# Altium PCB powMan_powPath.PcbDoc
Units mm, origin at the board's own origin, x right, y up, seen from the top; angles counter-clockwise.
Board outline 19.3 x 25.78 mm, 2 copper layers (Top Layer, Bottom Layer); 21 components, 13 nets, 59 pads, 39 vias.
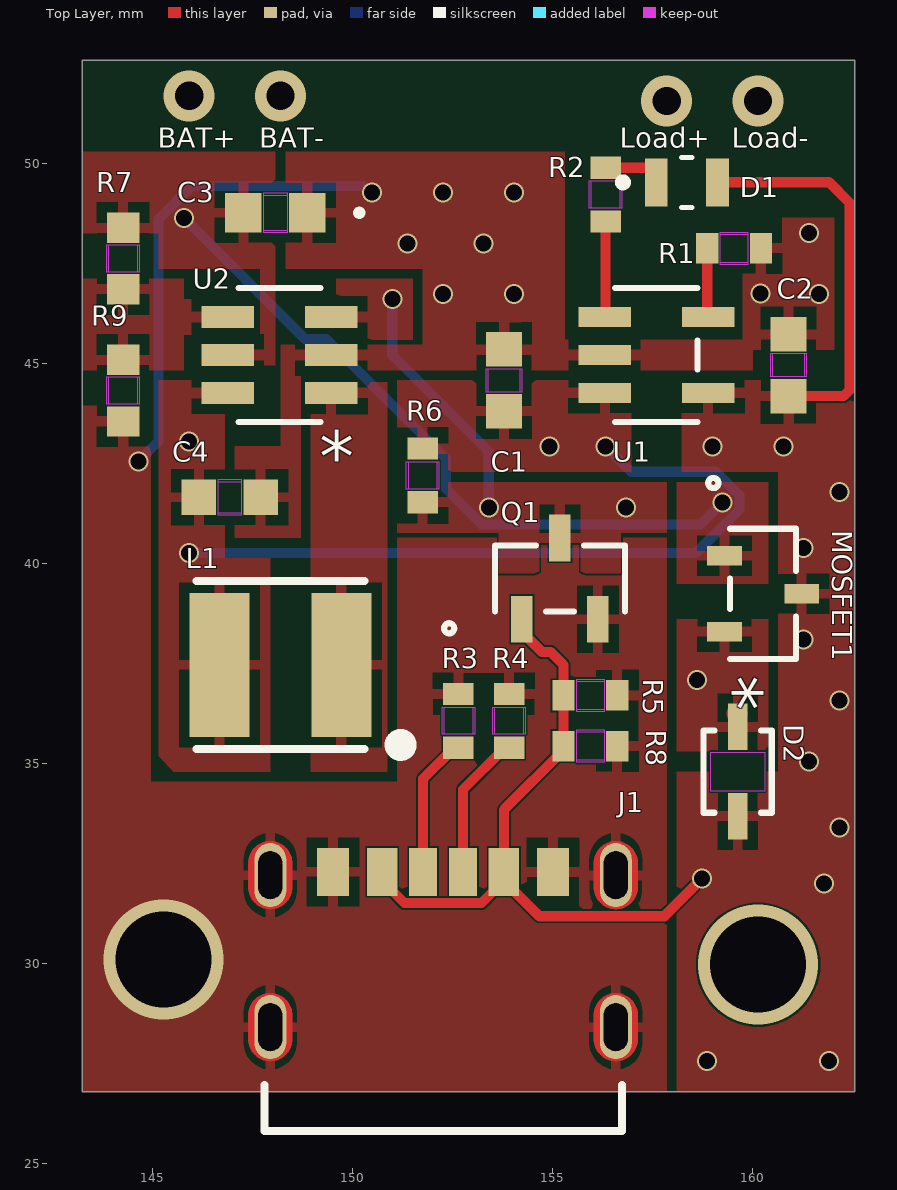
[diagram p0: Top Layer view]
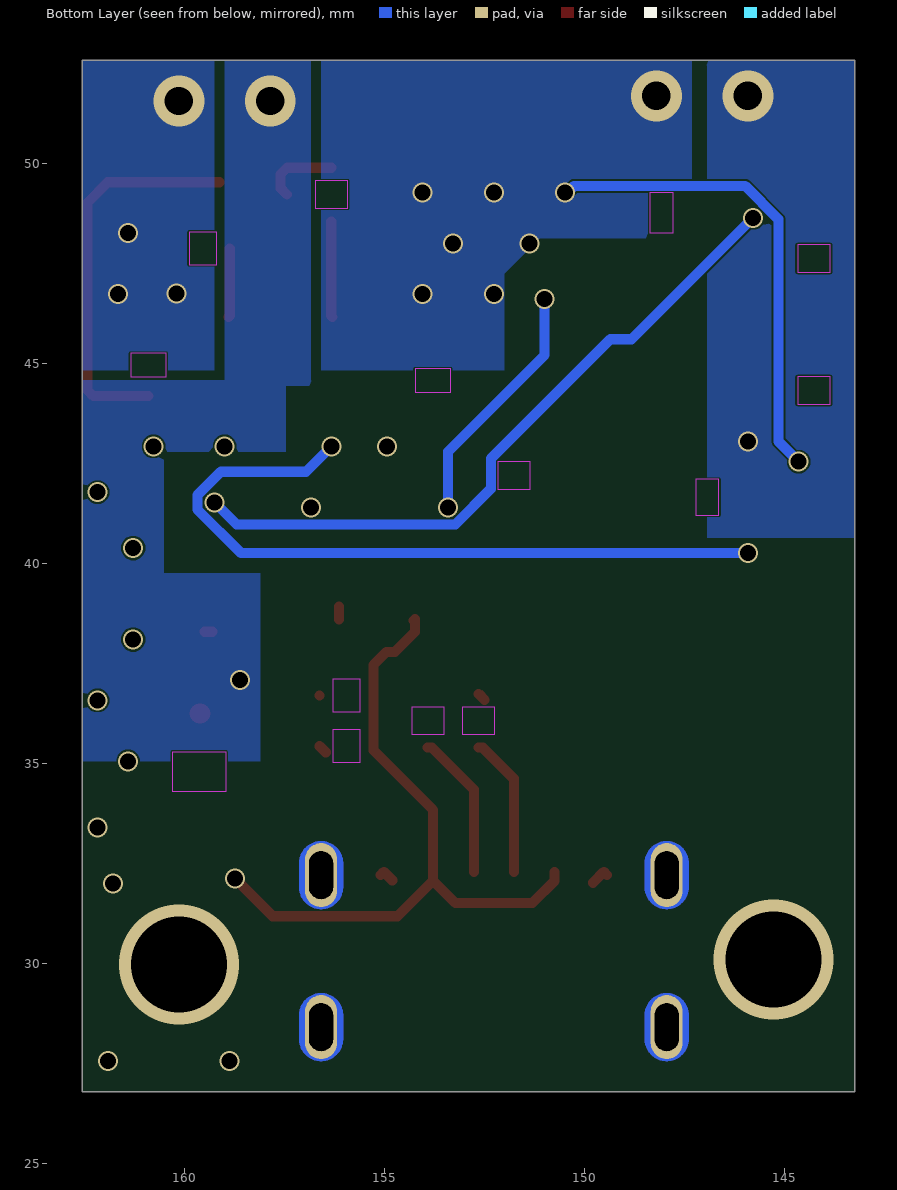
[diagram p1: Bottom Layer view, seen from below]
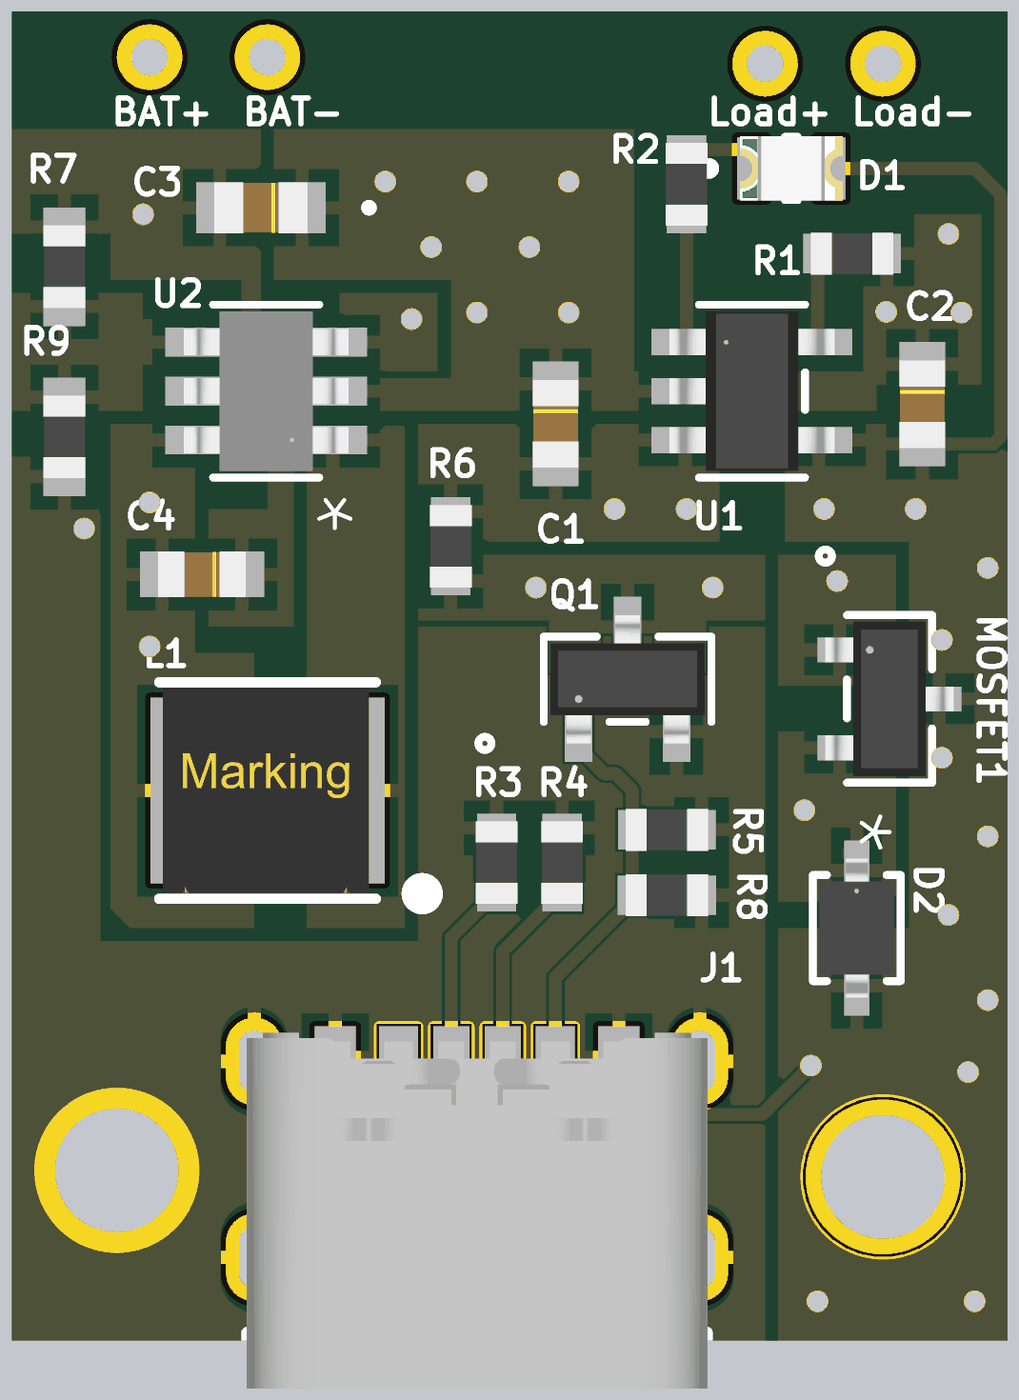
[diagram p2: 3D render of the assembled board from above, using the file's embedded part models]

## Layer stack, top to bottom
Top Solder: solder mask 0.0102, Solder Resist, Dk 3.5
Top Layer: signal copper 0.0356
Dielectric 1: dielectric 0.32, FR-4, Dk 4.8
Bottom Layer: signal copper 0.0356
Bottom Solder: solder mask 0.0102, Solder Resist, Dk 3.5

## Board outline
143.256,26.797 162.56,26.797 162.56,52.578 143.256,52.578

## Design rules (kind name [scope] priority, off if disabled: settings)
Clearance [All] p1: gap=0.05 ignorepadtopadclearanceinfootprint=TRUE
PlaneConnect Pad_Connect [(InPadClass('All Pads'))] p1: planeconnectstyle=Direct reliefexpansion=0.508 reliefentries=4 reliefconductorwidth=0.254 reliefairgap=0.254
PolygonConnect Direct_Connect_Vias [IsVia] p1: thpad.connectstyle=Direct thpad.reliefconductorwidth=0.254 thpad.reliefentries=4 thpad.polygonreliefangle="90 Angle" thpad.airgapwidth=0.254 smdpad.connectstyle=Relief smdpad.reliefconductorwidth=0.254 smdpad.reliefentries=4 smdpad.polygonreliefangle="90 Angle" smdpad.airgapwidth=0.254 via.connectstyle=Direct via.reliefconductorwidth=0.254 via.reliefentries=4 via.polygonreliefangle="90 Angle" via.airgapwidth=0.254
PolygonConnect [All] p2: connectstyle=Relief reliefconductorwidth=0.254 reliefentries=4 polygonreliefangle="90 Angle" airgapwidth=0.254
RoutingVias [All] p1: holewidth=0.711 width=1.27 viastyle="Through Hole" minholewidth=0.711 minwidth=1.27 maxholewidth=0.711 maxwidth=1.27
SolderMaskExpansion [All] p1: expansion=0.102 istentingtop=FALSE
Width [All] p1: maxlimit=0.5 minlimit=0.254 preferedwidth=0.254
29 further rules are at their usual default settings.

## Components (designator, comment, footprint, x,y, rotation, side; value= is the part's Value field where it differs from the comment)
C1 "4.7uF" CAP_0603_CL10A_1P6XP8_SAM 153.797,44.577 r270 top
C2 "4.7uF" CAP_0603_CL10A_1P6XP8_SAM 160.909,44.958 r270 top
C3 "10uF" CAP_0603_X1_WAL 148.082,48.768 r180 top
C4 "4.7 uF" CAP_0603_CL10A_1P6XP8_SAM 146.939,41.656 r180 top
D1 "LED" LED_KT-0805W 158.369,49.53 r0 top
D2 "BAT60JFILM" CR_60JFILM_STM 159.639,34.798 r270 top
J1 "USB4125-GF-A_REVA2" GCT_USB4125-GF-A_REVA2 152.273,29.21 r0 top
L1 "WE-LQS_4018" WE-LQS_4018 148.21,37.465 r0 top
MOSFET1 "NX2301P,215" SOT23_TO-236AB_NEX-L 160.274,39.243 r270 top
Q1 "2N7002NXAKR" TO-236AB_SOT23_NEX 155.194,39.624 r0 top
R1 "2K" RC0603N_YAG-L 159.549,47.879 r0 top
R2 "470" RC0603N_YAG-L 156.337,49.223 r90 top
R3 "5.1K" RC0603N_YAG-L 152.654,36.068 r90 top
R4 "5.1K" RC0603N_YAG-L 153.924,36.068 r90 top
R5 "100K" RC0603N_YAG-L 155.956,36.703 r0 top
R6 "100K" "RC0603N_YAG-L - duplicate" 151.765,42.202 r90 top
R7 "976K" RC0603N_YAG 144.272,47.625 r270 top
R8 "100K" "RC0603N_YAG-L - duplicate" 155.956,35.433 r180 top
R9 "309K" RC0603N_YAG 144.272,44.323 r270 top
U1 "MCP73831T-2ATI/OT" SOT-23-5_MC_MCH 157.607,45.212 r0 top
U2 "MCP1640BT-I/CHY" SOT-23-6_MC_MCH 148.184,45.212 r180 top

## Footprints (in the part's own frame and the unit in brackets; to place one, negate y for a bottom-side part, rotate by r counter-clockwise, add the part's x,y. Pads: shape width x height; smd on the part's side, far side on the other; paste and mask are expansions set on the pad)
CAP_0603_CL10A_1P6XP8_SAM [mil]
  rect 34x35 smd paste+0 mask+0: 1(-30.5,0) 2(30.5,0)
  Top Layer keep-out region: -11.5,-15.5 -11.5,15.5 11.5,15.5 11.5,-15.5
  Keep-Out Layer region: -11.5,-17.5 -11.5,17.5 11.5,17.5 11.5,-17.5
  body extent -34,-17 34,17, height 35
CAP_0603_X1_WAL [mil]
  rect 36x39 smd paste+0 mask+0: 1(-31.5,0) 2(31.5,0)
  Top Layer keep-out region: -11.5,-17.5 -11.5,17.5 11.5,17.5 11.5,-17.5
  Keep-Out Layer region: -11.5,-19.5 -11.5,19.5 11.5,19.5 11.5,-19.5
  silkscreen extent -86,-3 -80,3, body extent -36,-19 36,19, height 39
CR_60JFILM_STM [mil]
  rect 45.56x19.36 smd paste+0 mask+0: 1(-44,0) 2(44,0)
  Keep-Out Layer region: -19.22,-26.5 -19.22,26.5 19.22,26.5 19.22,-26.5
  silkscreen extent -41,-34 41,34, body extent -53,-29 53,29, height 45
GCT_USB4125-GF-A_REVA2 [mm]
  rect 0.7x1.2 smd: A5(-0.5,3.08) B5(0.5,3.08)
  rect 0.76x1.2 smd: A9(1.52,3.08) B9(-1.52,3.08)
  rect 0.8x1.2 smd: A12(2.75,3.08) B12(-2.75,3.08)
  oval 0.8x1.6 hole 0.6 slot 1.2 at 90 deg mask+0: S1(-4.32,3) S2(4.32,3) S3(-4.32,-0.8) S4(4.32,-0.8)
  Top Layer region: 4.349,3.849 4.377,3.847 4.406,3.843 4.434,3.838 4.462,3.831 4.49,3.823 4.517,3.813 4.544,3.802 4.57,3.79 4.595,3.776 4.62,3.761 4.643,3.745 4.666,3.727 4.688,3.709 4.709,3.689 4.729,3.668 4.747,3.646 4.765,3.623 4.781,3.6 4.796,3.575 4.81,3.55 4.822,3.524 4.833,3.497 4.843,3.47 4.851,3.442 4.858,3.414 4.863,3.386 4.867,3.357 4.869,3.329 4.87,3.3 4.87,2.7 4.869,2.671 4.867,2.643 4.863,2.614 4.858,2.586 4.851,2.558 4.843,2.53 4.833,2.503 4.822,2.476 4.81,2.45 4.796,2.425 4.781,2.4 4.765,2.377 4.747,2.354 4.729,2.332 4.709,2.311 4.688,2.291 4.666,2.273 4.643,2.255 4.62,2.239 4.595,2.224 4.57,2.21 4.544,2.198 4.517,2.187 4.49,2.177 4.462,2.169 4.434,2.162 4.406,2.157 4.377,2.153 4.349,2.151 4.32,2.15 4.291,2.151 4.263,2.153 4.234,2.157 4.206,2.162 4.178,2.169 4.15,2.177 4.123,2.187 4.096,2.198 4.07,2.21 4.045,2.224 4.02,2.239 3.997,2.255 3.974,2.273 3.952,2.291 3.931,2.311 3.911,2.332 3.893,2.354 3.875,2.377 3.859,2.4 3.844,2.425 3.83,2.45 3.818,2.476 3.807,2.503 3.797,2.53 3.789,2.558 3.782,2.586 3.777,2.614 3.773,2.643 3.771,2.671 3.77,2.7 3.77,3.3 3.771,3.329 3.773,3.357 3.777,3.386 3.782,3.414 3.789,3.442 3.797,3.47 3.807,3.497 3.818,3.524 3.83,3.55 3.844,3.575 3.859,3.6 3.875,3.623 3.893,3.646 3.911,3.668 3.931,3.689 3.952,3.709 3.974,3.727 3.997,3.745 4.02,3.761 4.045,3.776 4.07,3.79 4.096,3.802 4.123,3.813 4.15,3.823 4.178,3.831 4.206,3.838 4.234,3.843 4.263,3.847 4.291,3.849 4.32,3.85
  Top Layer region: -4.291,3.849 -4.263,3.847 -4.234,3.843 -4.206,3.838 -4.178,3.831 -4.15,3.823 -4.123,3.813 -4.096,3.802 -4.07,3.79 -4.045,3.776 -4.02,3.761 -3.997,3.745 -3.974,3.727 -3.952,3.709 -3.931,3.689 -3.911,3.668 -3.893,3.646 -3.875,3.623 -3.859,3.6 -3.844,3.575 -3.83,3.55 -3.818,3.524 -3.807,3.497 -3.797,3.47 -3.789,3.442 -3.782,3.414 -3.777,3.386 -3.773,3.357 -3.771,3.329 -3.77,3.3 -3.77,2.7 -3.771,2.671 -3.773,2.643 -3.777,2.614 -3.782,2.586 -3.789,2.558 -3.797,2.53 -3.807,2.503 -3.818,2.476 -3.83,2.45 -3.844,2.425 -3.859,2.4 -3.875,2.377 -3.893,2.354 -3.911,2.332 -3.931,2.311 -3.952,2.291 -3.974,2.273 -3.997,2.255 -4.02,2.239 -4.045,2.224 -4.07,2.21 -4.096,2.198 -4.123,2.187 -4.15,2.177 -4.178,2.169 -4.206,2.162 -4.234,2.157 -4.263,2.153 -4.291,2.151 -4.32,2.15 -4.349,2.151 -4.377,2.153 -4.406,2.157 -4.434,2.162 -4.462,2.169 -4.49,2.177 -4.517,2.187 -4.544,2.198 -4.57,2.21 -4.595,2.224 -4.62,2.239 -4.643,2.255 -4.666,2.273 -4.688,2.291 -4.709,2.311 -4.729,2.332 -4.747,2.354 -4.765,2.377 -4.781,2.4 -4.796,2.425 -4.81,2.45 -4.822,2.476 -4.833,2.503 -4.843,2.53 -4.851,2.558 -4.858,2.586 -4.863,2.614 -4.867,2.643 -4.869,2.671 -4.87,2.7 -4.87,3.3 -4.869,3.329 -4.867,3.357 -4.863,3.386 -4.858,3.414 -4.851,3.442 -4.843,3.47 -4.833,3.497 -4.822,3.524 -4.81,3.55 -4.796,3.575 -4.781,3.6 -4.765,3.623 -4.747,3.646 -4.729,3.668 -4.709,3.689 -4.688,3.709 -4.666,3.727 -4.643,3.745 -4.62,3.761 -4.595,3.776 -4.57,3.79 -4.544,3.802 -4.517,3.813 -4.49,3.823 -4.462,3.831 -4.434,3.838 -4.406,3.843 -4.377,3.847 -4.349,3.849 -4.32,3.85
  Top Layer region: 4.349,0.049 4.377,0.047 4.406,0.043 4.434,0.038 4.462,0.031 4.49,0.023 4.517,0.013 4.544,0.002 4.57,-0.01 4.595,-0.024 4.62,-0.039 4.643,-0.055 4.666,-0.073 4.688,-0.091 4.709,-0.111 4.729,-0.132 4.747,-0.154 4.765,-0.177 4.781,-0.2 4.796,-0.225 4.81,-0.25 4.822,-0.276 4.833,-0.303 4.843,-0.33 4.851,-0.358 4.858,-0.386 4.863,-0.414 4.867,-0.443 4.869,-0.471 4.87,-0.5 4.87,-1.1 4.869,-1.129 4.867,-1.157 4.863,-1.186 4.858,-1.214 4.851,-1.242 4.843,-1.27 4.833,-1.297 4.822,-1.324 4.81,-1.35 4.796,-1.375 4.781,-1.4 4.765,-1.423 4.747,-1.446 4.729,-1.468 4.709,-1.489 4.688,-1.509 4.666,-1.527 4.643,-1.545 4.62,-1.561 4.595,-1.576 4.57,-1.59 4.544,-1.602 4.517,-1.613 4.49,-1.623 4.462,-1.631 4.434,-1.638 4.406,-1.643 4.377,-1.647 4.349,-1.649 4.32,-1.65 4.291,-1.649 4.263,-1.647 4.234,-1.643 4.206,-1.638 4.178,-1.631 4.15,-1.623 4.123,-1.613 4.096,-1.602 4.07,-1.59 4.045,-1.576 4.02,-1.561 3.997,-1.545 3.974,-1.527 3.952,-1.509 3.931,-1.489 3.911,-1.468 3.893,-1.446 3.875,-1.423 3.859,-1.4 3.844,-1.375 3.83,-1.35 3.818,-1.324 3.807,-1.297 3.797,-1.27 3.789,-1.242 3.782,-1.214 3.777,-1.186 3.773,-1.157 3.771,-1.129 3.77,-1.1 3.77,-0.5 3.771,-0.471 3.773,-0.443 3.777,-0.414 3.782,-0.386 3.789,-0.358 3.797,-0.33 3.807,-0.303 3.818,-0.276 3.83,-0.25 3.844,-0.225 3.859,-0.2 3.875,-0.177 3.893,-0.154 3.911,-0.132 3.931,-0.111 3.952,-0.091 3.974,-0.073 3.997,-0.055 4.02,-0.039 4.045,-0.024 4.07,-0.01 4.096,0.002 4.123,0.013 4.15,0.023 4.178,0.031 4.206,0.038 4.234,0.043 4.263,0.047 4.291,0.049 4.32,0.05
  Top Layer region: -4.291,0.049 -4.263,0.047 -4.234,0.043 -4.206,0.038 -4.178,0.031 -4.15,0.023 -4.123,0.013 -4.096,0.002 -4.07,-0.01 -4.045,-0.024 -4.02,-0.039 -3.997,-0.055 -3.974,-0.073 -3.952,-0.091 -3.931,-0.111 -3.911,-0.132 -3.893,-0.154 -3.875,-0.177 -3.859,-0.2 -3.844,-0.225 -3.83,-0.25 -3.818,-0.276 -3.807,-0.303 -3.797,-0.33 -3.789,-0.358 -3.782,-0.386 -3.777,-0.414 -3.773,-0.443 -3.771,-0.471 -3.77,-0.5 -3.77,-1.1 -3.771,-1.129 -3.773,-1.157 -3.777,-1.186 -3.782,-1.214 -3.789,-1.242 -3.797,-1.27 -3.807,-1.297 -3.818,-1.324 -3.83,-1.35 -3.844,-1.375 -3.859,-1.4 -3.875,-1.423 -3.893,-1.446 -3.911,-1.468 -3.931,-1.489 -3.952,-1.509 -3.974,-1.527 -3.997,-1.545 -4.02,-1.561 -4.045,-1.576 -4.07,-1.59 -4.096,-1.602 -4.123,-1.613 -4.15,-1.623 -4.178,-1.631 -4.206,-1.638 -4.234,-1.643 -4.263,-1.647 -4.291,-1.649 -4.32,-1.65 -4.349,-1.649 -4.377,-1.647 -4.406,-1.643 -4.434,-1.638 -4.462,-1.631 -4.49,-1.623 -4.517,-1.613 -4.544,-1.602 -4.57,-1.59 -4.595,-1.576 -4.62,-1.561 -4.643,-1.545 -4.666,-1.527 -4.688,-1.509 -4.709,-1.489 -4.729,-1.468 -4.747,-1.446 -4.765,-1.423 -4.781,-1.4 -4.796,-1.375 -4.81,-1.35 -4.822,-1.324 -4.833,-1.297 -4.843,-1.27 -4.851,-1.242 -4.858,-1.214 -4.863,-1.186 -4.867,-1.157 -4.869,-1.129 -4.87,-1.1 -4.87,-0.5 -4.869,-0.471 -4.867,-0.443 -4.863,-0.414 -4.858,-0.386 -4.851,-0.358 -4.843,-0.33 -4.833,-0.303 -4.822,-0.276 -4.81,-0.25 -4.796,-0.225 -4.781,-0.2 -4.765,-0.177 -4.747,-0.154 -4.729,-0.132 -4.709,-0.111 -4.688,-0.091 -4.666,-0.073 -4.643,-0.055 -4.62,-0.039 -4.595,-0.024 -4.57,-0.01 -4.544,0.002 -4.517,0.013 -4.49,0.023 -4.462,0.031 -4.434,0.038 -4.406,0.043 -4.377,0.047 -4.349,0.049 -4.32,0.05
  Bottom Layer region: 4.349,3.849 4.377,3.847 4.406,3.843 4.434,3.838 4.462,3.831 4.49,3.823 4.517,3.813 4.544,3.802 4.57,3.79 4.595,3.776 4.62,3.761 4.643,3.745 4.666,3.727 4.688,3.709 4.709,3.689 4.729,3.668 4.747,3.646 4.765,3.623 4.781,3.6 4.796,3.575 4.81,3.55 4.822,3.524 4.833,3.497 4.843,3.47 4.851,3.442 4.858,3.414 4.863,3.386 4.867,3.357 4.869,3.329 4.87,3.3 4.87,2.7 4.869,2.671 4.867,2.643 4.863,2.614 4.858,2.586 4.851,2.558 4.843,2.53 4.833,2.503 4.822,2.476 4.81,2.45 4.796,2.425 4.781,2.4 4.765,2.377 4.747,2.354 4.729,2.332 4.709,2.311 4.688,2.291 4.666,2.273 4.643,2.255 4.62,2.239 4.595,2.224 4.57,2.21 4.544,2.198 4.517,2.187 4.49,2.177 4.462,2.169 4.434,2.162 4.406,2.157 4.377,2.153 4.349,2.151 4.32,2.15 4.291,2.151 4.263,2.153 4.234,2.157 4.206,2.162 4.178,2.169 4.15,2.177 4.123,2.187 4.096,2.198 4.07,2.21 4.045,2.224 4.02,2.239 3.997,2.255 3.974,2.273 3.952,2.291 3.931,2.311 3.911,2.332 3.893,2.354 3.875,2.377 3.859,2.4 3.844,2.425 3.83,2.45 3.818,2.476 3.807,2.503 3.797,2.53 3.789,2.558 3.782,2.586 3.777,2.614 3.773,2.643 3.771,2.671 3.77,2.7 3.77,3.3 3.771,3.329 3.773,3.357 3.777,3.386 3.782,3.414 3.789,3.442 3.797,3.47 3.807,3.497 3.818,3.524 3.83,3.55 3.844,3.575 3.859,3.6 3.875,3.623 3.893,3.646 3.911,3.668 3.931,3.689 3.952,3.709 3.974,3.727 3.997,3.745 4.02,3.761 4.045,3.776 4.07,3.79 4.096,3.802 4.123,3.813 4.15,3.823 4.178,3.831 4.206,3.838 4.234,3.843 4.263,3.847 4.291,3.849 4.32,3.85
  Bottom Layer region: -4.291,3.849 -4.263,3.847 -4.234,3.843 -4.206,3.838 -4.178,3.831 -4.15,3.823 -4.123,3.813 -4.096,3.802 -4.07,3.79 -4.045,3.776 -4.02,3.761 -3.997,3.745 -3.974,3.727 -3.952,3.709 -3.931,3.689 -3.911,3.668 -3.893,3.646 -3.875,3.623 -3.859,3.6 -3.844,3.575 -3.83,3.55 -3.818,3.524 -3.807,3.497 -3.797,3.47 -3.789,3.442 -3.782,3.414 -3.777,3.386 -3.773,3.357 -3.771,3.329 -3.77,3.3 -3.77,2.7 -3.771,2.671 -3.773,2.643 -3.777,2.614 -3.782,2.586 -3.789,2.558 -3.797,2.53 -3.807,2.503 -3.818,2.476 -3.83,2.45 -3.844,2.425 -3.859,2.4 -3.875,2.377 -3.893,2.354 -3.911,2.332 -3.931,2.311 -3.952,2.291 -3.974,2.273 -3.997,2.255 -4.02,2.239 -4.045,2.224 -4.07,2.21 -4.096,2.198 -4.123,2.187 -4.15,2.177 -4.178,2.169 -4.206,2.162 -4.234,2.157 -4.263,2.153 -4.291,2.151 -4.32,2.15 -4.349,2.151 -4.377,2.153 -4.406,2.157 -4.434,2.162 -4.462,2.169 -4.49,2.177 -4.517,2.187 -4.544,2.198 -4.57,2.21 -4.595,2.224 -4.62,2.239 -4.643,2.255 -4.666,2.273 -4.688,2.291 -4.709,2.311 -4.729,2.332 -4.747,2.354 -4.765,2.377 -4.781,2.4 -4.796,2.425 -4.81,2.45 -4.822,2.476 -4.833,2.503 -4.843,2.53 -4.851,2.558 -4.858,2.586 -4.863,2.614 -4.867,2.643 -4.869,2.671 -4.87,2.7 -4.87,3.3 -4.869,3.329 -4.867,3.357 -4.863,3.386 -4.858,3.414 -4.851,3.442 -4.843,3.47 -4.833,3.497 -4.822,3.524 -4.81,3.55 -4.796,3.575 -4.781,3.6 -4.765,3.623 -4.747,3.646 -4.729,3.668 -4.709,3.689 -4.688,3.709 -4.666,3.727 -4.643,3.745 -4.62,3.761 -4.595,3.776 -4.57,3.79 -4.544,3.802 -4.517,3.813 -4.49,3.823 -4.462,3.831 -4.434,3.838 -4.406,3.843 -4.377,3.847 -4.349,3.849 -4.32,3.85
  Bottom Layer region: 4.349,0.049 4.377,0.047 4.406,0.043 4.434,0.038 4.462,0.031 4.49,0.023 4.517,0.013 4.544,0.002 4.57,-0.01 4.595,-0.024 4.62,-0.039 4.643,-0.055 4.666,-0.073 4.688,-0.091 4.709,-0.111 4.729,-0.132 4.747,-0.154 4.765,-0.177 4.781,-0.2 4.796,-0.225 4.81,-0.25 4.822,-0.276 4.833,-0.303 4.843,-0.33 4.851,-0.358 4.858,-0.386 4.863,-0.414 4.867,-0.443 4.869,-0.471 4.87,-0.5 4.87,-1.1 4.869,-1.129 4.867,-1.157 4.863,-1.186 4.858,-1.214 4.851,-1.242 4.843,-1.27 4.833,-1.297 4.822,-1.324 4.81,-1.35 4.796,-1.375 4.781,-1.4 4.765,-1.423 4.747,-1.446 4.729,-1.468 4.709,-1.489 4.688,-1.509 4.666,-1.527 4.643,-1.545 4.62,-1.561 4.595,-1.576 4.57,-1.59 4.544,-1.602 4.517,-1.613 4.49,-1.623 4.462,-1.631 4.434,-1.638 4.406,-1.643 4.377,-1.647 4.349,-1.649 4.32,-1.65 4.291,-1.649 4.263,-1.647 4.234,-1.643 4.206,-1.638 4.178,-1.631 4.15,-1.623 4.123,-1.613 4.096,-1.602 4.07,-1.59 4.045,-1.576 4.02,-1.561 3.997,-1.545 3.974,-1.527 3.952,-1.509 3.931,-1.489 3.911,-1.468 3.893,-1.446 3.875,-1.423 3.859,-1.4 3.844,-1.375 3.83,-1.35 3.818,-1.324 3.807,-1.297 3.797,-1.27 3.789,-1.242 3.782,-1.214 3.777,-1.186 3.773,-1.157 3.771,-1.129 3.77,-1.1 3.77,-0.5 3.771,-0.471 3.773,-0.443 3.777,-0.414 3.782,-0.386 3.789,-0.358 3.797,-0.33 3.807,-0.303 3.818,-0.276 3.83,-0.25 3.844,-0.225 3.859,-0.2 3.875,-0.177 3.893,-0.154 3.911,-0.132 3.931,-0.111 3.952,-0.091 3.974,-0.073 3.997,-0.055 4.02,-0.039 4.045,-0.024 4.07,-0.01 4.096,0.002 4.123,0.013 4.15,0.023 4.178,0.031 4.206,0.038 4.234,0.043 4.263,0.047 4.291,0.049 4.32,0.05
  Bottom Layer region: -4.291,0.049 -4.263,0.047 -4.234,0.043 -4.206,0.038 -4.178,0.031 -4.15,0.023 -4.123,0.013 -4.096,0.002 -4.07,-0.01 -4.045,-0.024 -4.02,-0.039 -3.997,-0.055 -3.974,-0.073 -3.952,-0.091 -3.931,-0.111 -3.911,-0.132 -3.893,-0.154 -3.875,-0.177 -3.859,-0.2 -3.844,-0.225 -3.83,-0.25 -3.818,-0.276 -3.807,-0.303 -3.797,-0.33 -3.789,-0.358 -3.782,-0.386 -3.777,-0.414 -3.773,-0.443 -3.771,-0.471 -3.77,-0.5 -3.77,-1.1 -3.771,-1.129 -3.773,-1.157 -3.777,-1.186 -3.782,-1.214 -3.789,-1.242 -3.797,-1.27 -3.807,-1.297 -3.818,-1.324 -3.83,-1.35 -3.844,-1.375 -3.859,-1.4 -3.875,-1.423 -3.893,-1.446 -3.911,-1.468 -3.931,-1.489 -3.952,-1.509 -3.974,-1.527 -3.997,-1.545 -4.02,-1.561 -4.045,-1.576 -4.07,-1.59 -4.096,-1.602 -4.123,-1.613 -4.15,-1.623 -4.178,-1.631 -4.206,-1.638 -4.234,-1.643 -4.263,-1.647 -4.291,-1.649 -4.32,-1.65 -4.349,-1.649 -4.377,-1.647 -4.406,-1.643 -4.434,-1.638 -4.462,-1.631 -4.49,-1.623 -4.517,-1.613 -4.544,-1.602 -4.57,-1.59 -4.595,-1.576 -4.62,-1.561 -4.643,-1.545 -4.666,-1.527 -4.688,-1.509 -4.709,-1.489 -4.729,-1.468 -4.747,-1.446 -4.765,-1.423 -4.781,-1.4 -4.796,-1.375 -4.81,-1.35 -4.822,-1.324 -4.833,-1.297 -4.843,-1.27 -4.851,-1.242 -4.858,-1.214 -4.863,-1.186 -4.867,-1.157 -4.869,-1.129 -4.87,-1.1 -4.87,-0.5 -4.869,-0.471 -4.867,-0.443 -4.863,-0.414 -4.858,-0.386 -4.851,-0.358 -4.843,-0.33 -4.833,-0.303 -4.822,-0.276 -4.81,-0.25 -4.796,-0.225 -4.781,-0.2 -4.765,-0.177 -4.747,-0.154 -4.729,-0.132 -4.709,-0.111 -4.688,-0.091 -4.666,-0.073 -4.643,-0.055 -4.62,-0.039 -4.595,-0.024 -4.57,-0.01 -4.544,0.002 -4.517,0.013 -4.49,0.023 -4.462,0.031 -4.434,0.038 -4.406,0.043 -4.377,0.047 -4.349,0.049 -4.32,0.05
  silkscreen extent -4.47,-3.4 4.47,-2.25, body extent -4.47,-3.34 4.47,3.56, height 3.27
LED_KT-0805W [mm]
  rect 0.57x1.2 smd: A(0.765,0) C(-0.765,0)
  silkscreen extent -1.7,-0.63 0.13,0.63, body extent -1,-0.63 1,0.63, height 0.8
RC0603N_YAG [mil]
  rect 29.78x32 smd paste+0 mask+0: 1(-30.39,0) 2(30.39,0)
  Top Layer keep-out region: -13.5,-14 -13.5,14 13.5,14 13.5,-14
  Keep-Out Layer region: -13.5,-16 -13.5,16 13.5,16 13.5,-16
  body extent -31,-16 31,16, height 28
RC0603N_YAG-L [mm]
  rect 0.556x0.763 smd paste+0 mask+0: 1(-0.672,0) 2(0.672,0)
  Top Layer keep-out region: -0.343,-0.356 -0.343,0.356 0.343,0.356 0.343,-0.356
  Keep-Out Layer region: -0.343,-0.406 -0.343,0.406 0.343,0.406 0.343,-0.406
  body extent -0.8,-0.41 0.8,0.41, height 0.71
"RC0603N_YAG-L - duplicate" [mil]
  rect 22x30 smd paste+0 mask+0: 1(-26.5,0) 2(26.5,0)
  Top Layer keep-out region: -13.5,-14 -13.5,14 13.5,14 13.5,-14
  Keep-Out Layer region: -13.5,-16 -13.5,16 13.5,16 13.5,-16
  body extent -31,-16 31,16, height 28
SOT23_TO-236AB_NEX-L [mil]
  rect 19x34 smd paste+0 mask+0: 1(-37.4,-38) 2(37.4,-38) 3(0,38)
  silkscreen extent -114,-54 64,33, body extent -59,-49 59,49, height 43
SOT-23-5_MC_MCH [mil]
  rect 51.56x20 smd paste+0 mask+0: 1(-51,37.4) 2(-51,0) 3(-51,-37.4) 4(51,-37.4) 5(51,37.4)
  silkscreen extent -40,-66 40,66, body extent -63,-61 63,61, height 57
SOT-23-6_MC_MCH [mil]
  rect 52x22 smd paste+0 mask+0: 1(-51,37.4) 2(-51,0) 3(-51,-37.4) 4(51,-37.4) 5(51,0) 6(51,37.4)
  silkscreen extent -41,-66 41,66, body extent -63,-61 63,61, height 57
TO-236AB_SOT23_NEX [mil]
  rect 21x46 smd paste+0 mask+0: 1(-37.4,-40) 2(37.4,-40) 3(0,40)
  silkscreen extent -114,-54 64,32, body extent -59,-49 59,49, height 43
WE-LQS_4018 [mm]
  rect 1.5x3.6 smd: 1(1.525,0) 2(-1.525,0)
  silkscreen extent -2.1,-2.2 3.2,2.1, body extent -2.03,-2 1.97,2, height 1.81

## Part data
C1 C2 C4: library part CL10A475KP8NNNC, "4.7 uF Capacitor 0603", Manufacturer_Name=Samsung, Copyright="Copyright (C) 2025 Ultra Librarian. All rights reserved.", Manufacturer_Part_Number=CL10A475KP8NNNC
C3: library part 0603X106M100CT, "capacitor 10 uF 0603", Manufacturer_Name=Walsin, Copyright="Copyright (C) 2026 Ultra Librarian. All rights reserved.", Manufacturer_Part_Number=0603X106M100CT
D1: library part KT-0805W, "Light Emitting Diodes", Package=Package, Check_prices=https://www.snapeda.com/parts/KT-0805W/Hubei+KENTO+Elec/view-part/?ref=eda, MF="Hubei KENTO Elec", MP=KT-0805W, SnapEDA_Link=https://www.snapeda.com/parts/KT-0805W/Hubei+KENTO+Elec/view-part/?ref=snap
D2: "10 V General pupose  Signal Schottky Diode", Manufacturer_Name=STMicroelectronics, Copyright="Copyright (C) 2025 Ultra Librarian. All rights reserved.", Manufacturer_Part_Number=BAT60JFILM
J1: "USB C female connector", Package=None, Availability=Unavailable, MP=USB4125-GF-A_REVA2, Price=None
L1: "INDICATEUR FIXE 4,7 UH 1,7 A 70 MOHM CMS", Package="Nonstandard WÃ¼rth Elektronik", Check_prices=https://www.snapeda.com/parts/74404042047/W%25C3%25BCrth+Elektronik+Midcom/view-part/?ref=eda, MF="WÃ¼rth Elektronik", MP=74404042047, SnapEDA_Link=https://www.snapeda.com/parts/74404042047/W%25C3%25BCrth+Elektronik+Midcom/view-part/?ref=snap
MOSFET1: "MOSFET P-Chanel 400mW", Manufacturer_Name=Nexperia, Copyright="Copyright (C) 2025 Ultra Librarian. All rights reserved.", Manufacturer_Part_Number=NX2301P,215
Q1: "N-MOSFET 60VDS 190ID", Manufacturer_Name=Nexperia, Copyright="Copyright (C) 2025 Ultra Librarian. All rights reserved.", Manufacturer_Part_Number=2N7002NXAKR
R1: library part RC0603FR-072KL, "RES SMD 2kO 1% 1/10W 0603", Manufacturer_Name=Yageo, Copyright="Copyright (C) 2025 Ultra Librarian. All rights reserved.", Manufacturer_Part_Number=RC0603FR-072KL
R2: library part RC0603FR-07470RL, "RESISTOR; 0603; 470 OHM; 1%; 100PPM; 0.1W; THICK FILM", Manufacturer_Name=Yageo, Copyright="Copyright (C) 2026 Ultra Librarian. All rights reserved.", Manufacturer_Part_Number=RC0603FR-07470RL
R3 R4: library part RC0603FR-075K1L, "RES 5.1K SMD 0603", Manufacturer_Name=Yageo, Copyright="Copyright (C) 2025 Ultra Librarian. All rights reserved.", Manufacturer_Part_Number=RC0603FR-075K1L
R5 R6 R8: library part RC0603FR-07100KL, "RES, 100 k, 1%, 0.1 W, 0603", Manufacturer_Name=Yageo, Copyright="Copyright (C) 2025 Ultra Librarian. All rights reserved.", Manufacturer_Part_Number=RC0603FR-07100KL
R7: library part RC0603FR-07976KL, "resistor 976K 0603", Manufacturer_Name=Yageo, Copyright="Copyright (C) 2026 Ultra Librarian. All rights reserved.", Manufacturer_Part_Number=RC0603FR-07976KL
R9: library part RC0603FR-07309KL, "resistor 309K 0603", Manufacturer_Name=Yageo, Copyright="Copyright (C) 2025 Ultra Librarian. All rights reserved.", Manufacturer_Part_Number=RC0603FR-07309KL
U1: library part MCP73831T-2ATIOT, "Miniature Single-Cell, Fully Integrated Li-Ion, / Li-Polymer Charge Management Controller", Manufacturer_Name=Microchip, Copyright="Copyright (C) 2026 Ultra Librarian. All rights reserved.", Manufacturer_Part_Number=MCP73831T-2ATI/OT, RefDes=RefDes, Type=Type
U2: library part MCP1640BT-ICHY, "Boost Regulator max input 5.5V output 2 - 5.5V max output 350mA", Manufacturer_Name=Microchip, Copyright="Copyright (C) 2025 Ultra Librarian. All rights reserved.", Manufacturer_Part_Number=MCP1640BT-I/CHY, RefDes=RefDes, Type=Type

## Via types
v1: diameter 0.5, hole 0.4, Top Layer to Bottom Layer, tented both sides, 33 vias
v2: diameter 1.27, hole 0.711, Top Layer to Bottom Layer, 4 vias
v3: diameter 3, hole 2.4, Top Layer to Bottom Layer, 2 vias

## Nets (pads, with @x,y where several pads share a name; then routed paths per layer and width w, separated by ;. In a path a pad name is that pad's centre, name@x,y a point inside that pad or via, vN(x,y) a via of type N, cw(c..) or ccw(c..) an arc to the next point about the centre after c; other vN are vias at no path point)
Battery+: C1.2 C4.2 L1.2 R6.2 U1.3 U2.6 | length 18.4
  Bottom Layer w0.254: v1(145.923,40.259) 158.592,40.259 159.685,41.352 159.685,41.706 159.098,42.292 156.971,42.292 v1(156.337,42.926)
  other v1: 154.94,42.926 145.923,43.053
  other v2: 145.923,51.689
Battery-: C1.1 C2.1 C3.1 C4.1 J1.A12 J1.B12 J1.S1 J1.S2 J1.S3 J1.S4 Q1.2 R1.2 R3.2 R4.2 R5.2 R8.1 R9.2 U1.2 U2.2 | length 13.7
  Top Layer w0.254: J1.B12@149.443,32.21 J1.B12 J1.B12@149.796,32.017 ; R3.2@152.503,36.589 R3.2 ; J1.A12@154.813,32.08 J1.A12 J1.A12@155.103,32.21 ; Q1.2 Q1.2@156.144,38.925 ; R8.1@156.477,35.281 R8.1
  Bottom Layer w0.254: v1(144.653,42.545) 145.161,43.053 145.161,48.61 145.991,49.44 150.264,49.44 150.428,49.276 v1(150.495,49.276)
  other v1: 152.273,46.736 154.051,46.736 160.21,46.749 161.671,46.736 151.384,48.006 153.289,48.006 161.417,48.26 152.273,49.276 154.051,49.276
  other v2: 160.147,51.562 148.209,51.689
  other v3: 145.288,30.099
BOOST_OUT: C3.2 MOSFET1.1 R7.1 U2.5 | length 17.3
  Bottom Layer w0.254: v1(145.796,48.641) 148.831,45.606 149.361,45.606 152.348,42.618 152.348,41.866 153.239,40.975 158.704,40.975 v1(159.258,41.529)
EN: Q1.3 R6.1 U2.3 | length 6.2
  Bottom Layer w0.254: v1(151.003,46.609) 151.003,45.212 153.416,42.799 v1(153.416,41.402)
  other v1: 156.845,41.402
Load+: D2.1 MOSFET1.2 | length 0.2
  Top Layer w0.254: MOSFET1.2 MOSFET1.2@159.499,38.293
  Top Layer w0.5: D2.1@159.606,36.244 D2.1@159.635,36.244
  other v1: 158.623,37.084
  other v2: 157.861,51.562
NetD1_C: D1.C R2.2 | length 1.9
  Top Layer w0.254: R2.2 157.446,49.895 157.604,49.737 D1.C 157.604,49.381 D1.C@157.446,49.223
NetJ1_A5: J1.A5 R3.1 | length 3.5
  Top Layer w0.254: J1.A5 151.773,34.618 152.551,35.396 R3.1
NetJ1_B5: J1.B5 R4.1 | length 3.6
  Top Layer w0.254: J1.B5 152.773,34.348 153.821,35.396 R4.1
NetL1_1: L1.1 U2.1
NetR1_1: R1.1 U1.5 | length 1.7
  Top Layer w0.254: R1.1 158.877,46.187 U1.5
NetR2_1: R2.1 U1.1 | length 2.4
  Top Layer w0.254: U1.1 156.337,46.187 R2.1
NetR7_2: R7.2 R9.1 U2.4
Vin: C2.2 D1.A D2.2 J1.A9 J1.B9 MOSFET1.3 Q1.1 R5.1 R8.2 U1.4 | length 27
  Top Layer w0.254: J1.B9 150.753,32.07 151.31,31.513 153.236,31.513 J1.A9@153.793,32.07 ; Q1.1@154.275,38.577 Q1.1 154.244,38.291 154.743,37.792 154.958,37.792 155.284,37.465 R5.1 ; R5.1 R8.2 155.283,35.331 153.793,33.841 J1.A9 J1.A9@153.793,32.07 ; v1(158.75,32.131) 157.802,31.183 154.68,31.183 J1.A9@153.793,32.07 ; D1.A 161.925,49.53 162.433,49.022 162.433,44.332 162.284,44.183 C2.2
  other v1: 158.877,27.559 161.925,27.559 161.798,32.004 162.179,33.401 161.417,35.052 162.179,36.576 161.29,38.1 161.29,40.386 162.179,41.783 159.004,42.926 160.782,42.926
copper on no net:
  other v3: 160.147,29.972

## Polygon pours and split planes (outlines as drawn)
Battery- on Top Layer "BATTERY-_L01_P013" (solid, pour order 13): 157.861,40.64 151.13,40.64 151.13,34.544 143.256,34.544 143.256,26.797 157.861,26.797
BOOST_OUT on Top Layer "BOOST_OUT_L01_P004" (solid, pour order 4): 146.05,45.593 146.05,44.958 148.082,44.958 148.082,45.72 148.082,50.292 143.256,50.292 143.256,48.26 145.161,48.26 145.161,47.371 147.701,47.371 147.701,45.593
Battery- on Top Layer "BATTERY-_L01_P006" (solid, pour order 6): 148.336,50.292 148.336,47.371 151.765,47.371 151.765,45.466 148.844,45.466 148.844,44.831 154.215,44.831 154.215,49.62 153.543,50.292
Battery- on Top Layer "BATTERY-_L01_P008" (solid, pour order 8): 157.099,44.831 151.892,44.831 151.892,50.292 155.321,50.292 155.321,45.593 157.099,45.593
EN on Top Layer "EN_L01_P007" (solid, pour order 7): 148.59,46.736 148.59,45.593 151.511,45.593 151.511,47.117 149.606,47.117 149.606,46.736
Battery+ on Top Layer "BATTERY+_L01_P010" (solid, pour order 10): 156.972,44.577 151.13,44.577 151.13,42.291 156.972,42.291
EN on Top Layer "EN_L01_P012" (solid, pour order 12): 153.67,42.037 156.718,42.037 156.718,39.751 153.67,39.751
EN on Top Layer "EN_L01_P014" (solid, pour order 14): 157.861,42.037 151.13,42.037 151.13,40.767 157.861,40.767
BOOST_OUT on Top Layer "BOOST_OUT_L01_P017" (solid, pour order 17): 158.115,42.037 158.115,39.497 160.401,39.497 160.401,42.037
Battery- on Top Layer "BATTERY-_L01_P005" (solid, pour order 5): 143.256,43.942 144.97,43.942 144.97,26.797 143.256,26.797
Load+ on Top Layer "LOAD+_L01_P016" (solid, pour order 16): 158.115,35.306 160.401,35.306 160.401,38.608 158.115,38.608
Vin on Top Layer "VIN_L01_P015" (solid, pour order 15): 158.115,34.798 158.115,26.797 162.56,26.797 162.56,43.18 160.528,43.18 160.655,43.053 160.655,34.798
Vin on Top Layer "VIN_L01_P011" (solid, pour order 11): 158.242,44.577 158.242,42.291 162.56,42.291 162.56,44.577
Battery- on Top Layer "BATTERY-_L01_P009" (solid, pour order 9): 155.307,44.831 160.02,44.831 160.02,45.339 162.052,45.339 162.052,48.641 160.02,48.641 159.766,48.387 159.766,45.593 155.307,45.593
NetR7_2 on Top Layer "NETR7_2_L01_P003" (solid, pour order 3): 147.701,46.609 145.796,46.609 145.796,47.117 143.256,47.117 143.256,44.831 145.796,44.831 145.796,45.72 147.701,45.72
Battery+ on Top Layer "BATTERY+_L01_P002" (solid, pour order 2): 147.701,44.577 147.701,43.815 146.812,43.815 146.812,40.132 147.955,40.132 147.955,34.798 145.542,34.798 145.161,35.179 145.161,44.577
NetL1_1 on Top Layer "NETL1_1_L01_P000" (solid, pour order 0): 148.971,44.548 148.971,34.798 150.876,34.798 150.876,44.536
Battery- on Top Layer "BATTERY-_L01_P001" (solid, pour order 1): 150.241,45.466 150.241,44.831 148.717,44.831 148.717,40.64 147.066,40.64 147.066,42.926 148.209,42.926 148.209,45.466
Battery+ on Bottom Layer "BATTERY+_L02_P021" (solid, pour order 21): 143.256,52.578 147.066,52.578 146.939,52.451 146.939,40.64 143.256,40.64
Battery- on Bottom Layer "BATTERY-_L02_P020" (solid, pour order 20): 147.32,52.578 156.591,52.578 156.591,44.831 152.019,44.831 152.019,47.244 151.13,48.133 147.32,48.133
Load+ on Bottom Layer "LOAD+_L02_P019" (solid, pour order 19): 159.004,52.578 159.004,44.577 162.56,44.577 162.56,35.052 158.115,35.052 158.115,39.751 160.528,39.751 160.528,42.799 157.48,42.799 157.48,44.45 156.718,44.45 156.845,44.577 156.845,52.578
Battery- on Bottom Layer "BATTERY-_L02_P018" (solid, pour order 18): 159.258,52.578 159.258,44.831 162.56,44.831 162.56,52.578

## Silkscreen, mask and mechanical layers (free items; w line width, h text height)
Top Overlay:
  text "BAT+" at 145.134,50.392 h0.5
  text "BAT-" at 147.674,50.392 h0.5
  text "Load+" at 156.691,50.392 h0.5
  text "Load-" at 159.485,50.392 h0.5
Mechanical 1:
  the board outline again, w0.254

## Text inside footprints (layer, text, board x,y; h text height)
D2: Top Overlay "*" at 159.004,37.193 h1.27 r270; Mechanical 13 "*" at 159.004,35.763 h1.27 r270
U1: Mechanical 13 "*" at 156.642,45.578 h1.27
U2: Top Overlay "*" at 150.05,43.83 h1.27 r180; Mechanical 13 "*" at 149.022,45.009 h1.27 r180